# EAGLE board main (EAGLE 7.7.0)
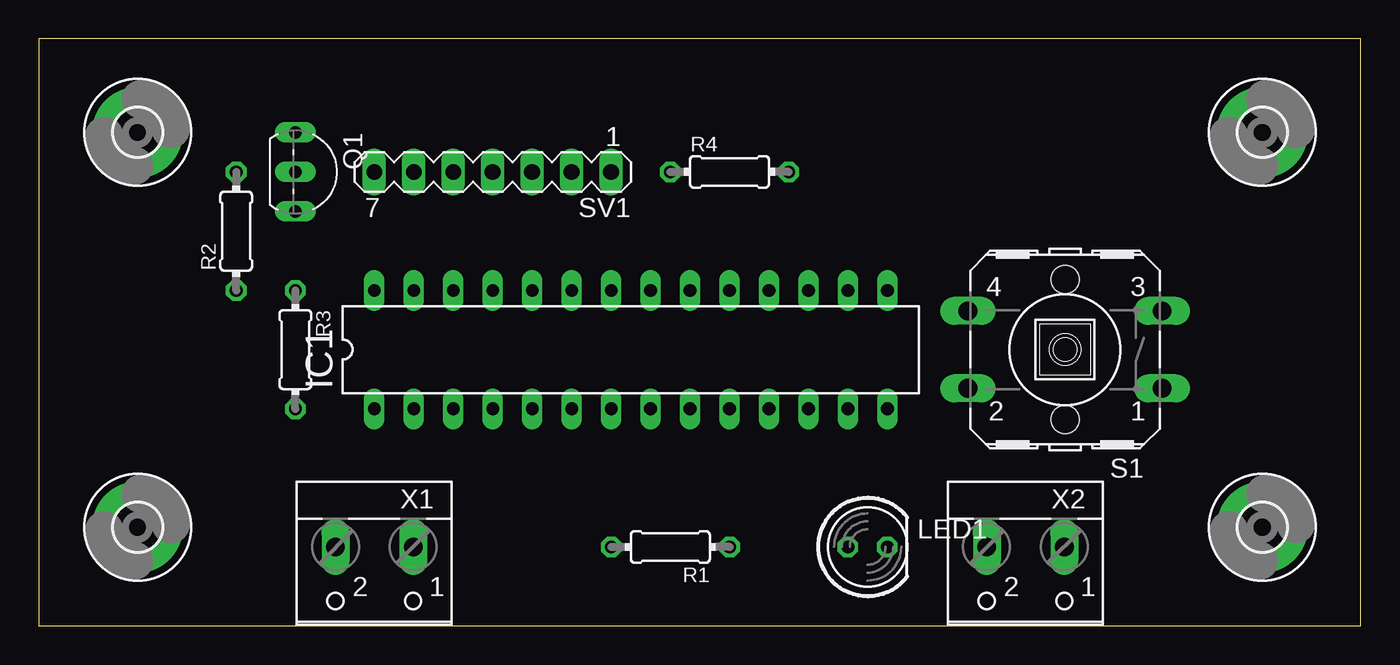
[diagram p0: board, top side]
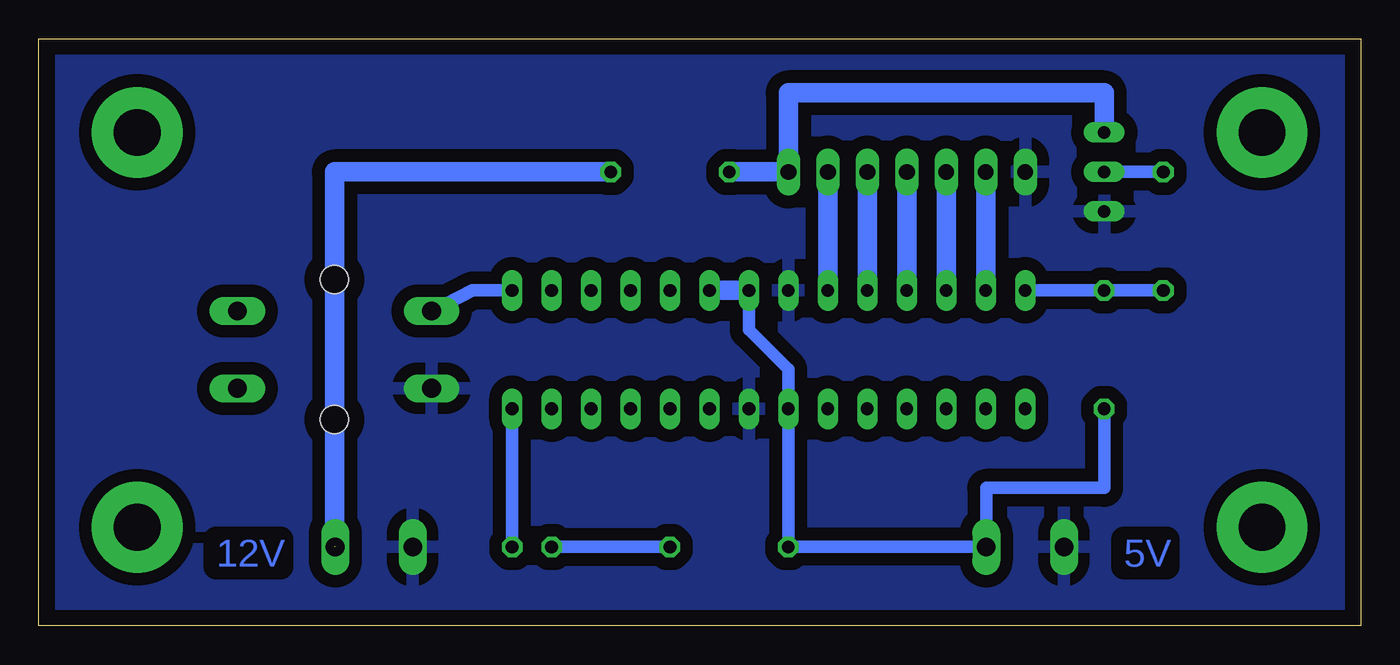
[diagram p1: board, bottom side, seen from below]

Size 85.07 x 37.77 mm. Coordinates in mm from the lower left corner, seen from the top.
Outline: 0,0 85.07,0 85.07,37.77 0,37.77 0,0
Copper layers (1*16): Top 0.035mm / dielectric 1.5mm / Bottom 0.035mm
Design rules "default *": minimum track width 10mil, minimum drill 24mil, track to track 8mil, track to pad 8mil, pad to pad 8mil, via to via 8mil, smd to smd 8mil, copper to edge 40mil, drill to drill 8mil, minimum pad ring 10mil, minimum via ring 8mil, stop-mask expansion 4mil, vias tented up to drill 0mil, thermal gap 30mil

## Footprints (pad centres in the part's own frame; a part is rotated, then mirrored left to right if it is on the bottom)
3,0-PAD = drill 3 pad 5.842: B3,0 0,0
DIL28-3 = drill 0.813 long: 1 -16.51,-3.81; 2 -13.97,-3.81; 3 -11.43,-3.81; 4 -8.89,-3.81; 5 -6.35,-3.81; 6 -3.81,-3.81; 7 -1.27,-3.81; 8 1.27,-3.81; 9 3.81,-3.81; 10 6.35,-3.81; 11 8.89,-3.81; 12 11.43,-3.81; 13 13.97,-3.81; 14 16.51,-3.81; 15 16.51,3.81; 16 13.97,3.81; 17 11.43,3.81; 18 8.89,3.81; 19 6.35,3.81; 20 3.81,3.81; 21 1.27,3.81; 22 -1.27,3.81; 23 -3.81,3.81; 24 -6.35,3.81; 25 -8.89,3.81; 26 -11.43,3.81; 27 -13.97,3.81; 28 -16.51,3.81
LED5MM = drill 0.813 octagon: A -1.27,0; K 1.27,0
TO92-EBC = drill 0.813 long: B 0,-1.27; C -2.54,-1.27; E 2.54,-1.27
0204/7 = drill 0.813 octagon: 1 -3.81,0; 2 3.81,0
B3F-40XX = drill 1.194 long: 1 -6.248,2.489; 2 6.248,2.489; 3 -6.248,-2.489; 4 6.248,-2.489 | hole 1.803: 0,-4.496; 0,4.496
MA07-1 = drill 1.016 long: 1 -7.62,0; 2 -5.08,0; 3 -2.54,0; 4 0,0; 5 2.54,0; 6 5.08,0; 7 7.62,0
W237-102 = drill 1.194 long: 1 -2.5,-1.27; 2 2.5,-1.27

## Placement (x,y rotation side)
H1  MOUNT-PAD-ROUND3.0  [3,0-PAD]  6.35,31.75 0 top
H2  MOUNT-PAD-ROUND3.0  [3,0-PAD]  6.35,6.35 0 top
H3  MOUNT-PAD-ROUND3.0  [3,0-PAD]  78.74,6.35 0 top
H4  MOUNT-PAD-ROUND3.0  [3,0-PAD]  78.74,31.75 0 top
IC1  MEGA8-P  [DIL28-3]  38.1,17.78 0 top
LED1  [LED5MM]  53.34,5.08 0 top
Q1  BC548  [TO92-EBC]  17.78,29.21 270 top
R1  1K  [0204/7]  40.64,5.08 180 top
R2  4K7  [0204/7]  12.7,25.4 90 top
R3  4K7  [0204/7]  16.51,17.78 270 top
R4  4K7  [0204/7]  44.45,29.21 0 top
S1  [B3F-40XX]  66.04,17.78 180 top
SV1  [MA07-1]  29.21,29.21 180 top
X1  [W237-102]  21.59,3.81 180 top
X2  [W237-102]  63.5,3.81 180 top

## Library data of the parts
H1-H4 = holes
IC1 = atmel; OC_FARNELL: unknown; OC_NEWARK: unknown
LED1 = led
Q1 = transistor-npn
R1-R4 = rcl
S1 = switch-omron; MF: OMRON COMPONENTS USA; MPN: B3F-4000; OC_FARNELL: 176434; OC_NEWARK: 36K3105
SV1 = con-lstb; OC_FARNELL: unknown; OC_NEWARK: unknown
X1 X2 = con-wago-500; MPN: 237-102; OC_FARNELL: unknown; OC_NEWARK: 70K9898

## Nets
+5V: IC1.7 IC1.20 IC1.21 R1.2 R3.2 X1.1
+12V: R4.2 X2.1
GND: IC1.8 IC1.22 Q1.E S1.2 SV1.7 X1.2 X2.2
N$1: IC1.15 S1.4
N$2: IC1.14 LED1.K
N$3: LED1.A R1.1
N$4: IC1.27 SV1.6
N$5: Q1.B R2.2
N$6: Q1.C R4.1 SV1.1
N$7: IC1.28 R2.1 R3.1
N$8: IC1.26 SV1.5
N$9: IC1.25 SV1.4
N$10: IC1.24 SV1.3
N$11: IC1.23 SV1.2

## Tracks (layer width: path | path; a pad name or v marks a point on that pad's centre or on a via)
+5V
  Bottom 0.813: R3.2 16.51,8.89 24.09,8.89 X1.1 R1.2 IC1.7 36.83,16.51 39.37,19.05 IC1.21
  Bottom 1.27: IC1.21 IC1.20
+12V  (1 unrouted)
  Bottom 1.27: R4.2 66.04,29.21 66.04,5.08
GND
  pour Bottom (isolate 0.813): 1.27,36.83 83.82,36.83 83.82,1.27 1.27,1.27
N$1
  Bottom 0.406: S1.4 59.69,20.27
  Bottom 0.813: 59.69,20.27 57.15,21.59 IC1.15
N$2
  Bottom 0.813: LED1.K IC1.14
N$3
  Bottom 0.813: LED1.A R1.1
N$4
  Bottom 1.27: SV1.6 IC1.27
N$5
  Bottom 0.813: R2.2 Q1.B
N$6
  Bottom 1.27: R4.1 SV1.1 36.83,34.29 16.51,34.29 Q1.C
N$7
  Bottom 0.813: IC1.28 R3.1 R2.1
N$8
  Bottom 1.27: SV1.5 IC1.26
N$9
  Bottom 1.27: SV1.4 IC1.25
N$10
  Bottom 1.27: SV1.3 IC1.24
N$11
  Bottom 1.27: SV1.2 IC1.23

## Text on the board
Bottom: 5V | 12V